# Altium PCB hmi_driver.PcbDoc
Units mm, origin at the board's own origin, x right, y up, seen from the top; angles counter-clockwise.
Board outline 93.95 x 43.73 mm, 2 copper layers (Top Layer, Bottom Layer); 79 components, 56 nets, 269 pads, 33 vias.
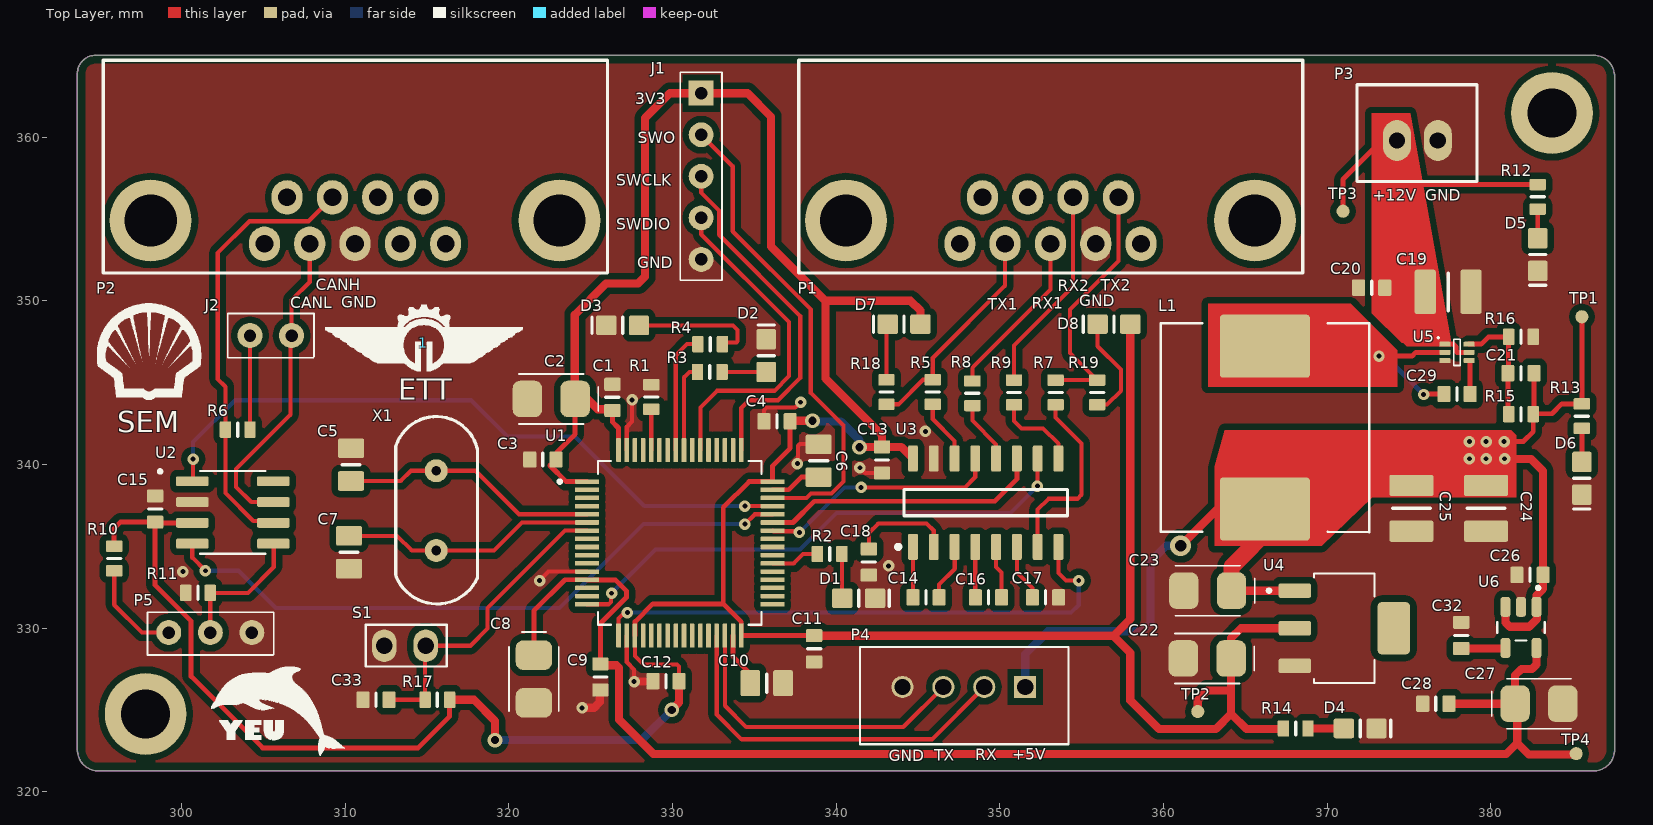
[diagram p0: Top Layer view]
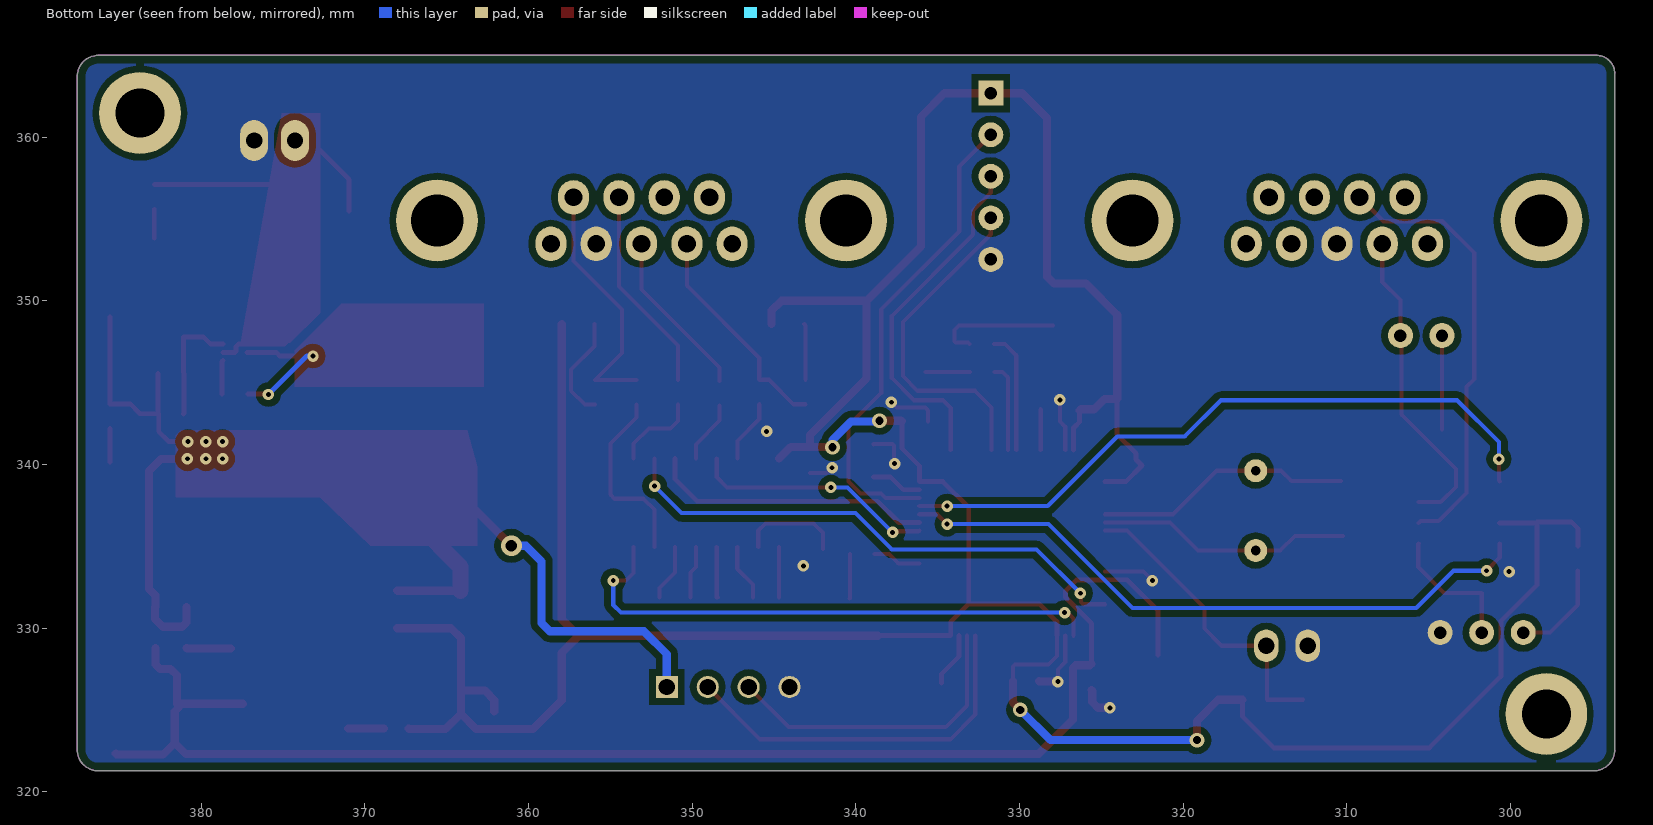
[diagram p1: Bottom Layer view, seen from below]

## Layer stack, top to bottom
Top Solder: solder mask 0.0102, Solder Resist, Dk 3.5
Top Layer: signal copper 0.0356
Dielectric 1: dielectric 0.32, FR-4, Dk 4.8
Bottom Layer: signal copper 0.0356
Bottom Solder: solder mask 0.0102, Solder Resist, Dk 3.5

## Board outline
293.625,322.545 293.625,363.9 cw(c294.725,363.9) 294.725,365 386.305,365 cw(c386.305,363.73) 387.575,363.73 387.575,322.545 cw(c386.305,322.545) 386.305,321.275 294.895,321.275 cw(c294.895,322.545)

## Design rules (kind name [scope] priority, off if disabled: settings)
BoardOutlineClearance Silk_Top [OnLayer('Top Overlay')] p1: gap=0 ignorepadtopadclearanceinfootprint=FALSE
BoardOutlineClearance [All] p2: gap=0.5 ignorepadtopadclearanceinfootprint=FALSE
Clearance VIN [InNet('VIN')] p1: gap=0.5 ignorepadtopadclearanceinfootprint=FALSE except(0: Arc-Hole Track-Hole SMDPad-Hole THPad-Hole Via-Hole Fill-Hole Poly-Hole Region-Hole Text-Hole)
Clearance SOT-563 [HasFootprint('SOT-563')] p2: gap=0.2 ignorepadtopadclearanceinfootprint=FALSE except(0: Arc-Hole Track-Hole SMDPad-Hole THPad-Hole Via-Hole Fill-Hole Poly-Hole Region-Hole Text-Hole)
Clearance 10-WFDFN [HasFootprint('10-WFDFN')] p3: gap=0.2 ignorepadtopadclearanceinfootprint=FALSE except(0: Arc-Hole Track-Hole SMDPad-Hole THPad-Hole Via-Hole Fill-Hole Poly-Hole Region-Hole Text-Hole)
Clearance HTSSOP-14 [HasFootprint('HTSSOP-14')] p4: gap=0.2 ignorepadtopadclearanceinfootprint=FALSE except(0: Arc-Hole Track-Hole SMDPad-Hole THPad-Hole Via-Hole Fill-Hole Poly-Hole Region-Hole Text-Hole)
Clearance Polygon [IsRegion] p5: gap=0.4 ignorepadtopadclearanceinfootprint=FALSE except(0: Arc-Hole Track-Hole SMDPad-Hole THPad-Hole Via-Hole Fill-Hole Poly-Hole Region-Hole Text-Hole)
Clearance USB_CONNECTOR [HasFootprint('MICRO USB B SMD')] p6: gap=0.2 ignorepadtopadclearanceinfootprint=TRUE except(0: Arc-Hole Track-Hole SMDPad-Hole THPad-Hole Via-Hole Fill-Hole Poly-Hole Region-Hole Text-Hole; 0.15: Arc-SMDPad Arc-THPad Track-SMDPad Track-THPad SMDPad-SMDPad SMDPad-THPad THPad-THPad)
Clearance [All] p7: gap=0.2 ignorepadtopadclearanceinfootprint=FALSE except(0: Arc-Hole Track-Hole SMDPad-Hole THPad-Hole Via-Hole Fill-Hole Poly-Hole Region-Hole Text-Hole)
Height [All] p1: minheight=0 maxheight=35 prefheight=12.7
HoleSize [All] p1: absolutevalues=TRUE maxlimit=3.5 minlimit=0.025 maxpercent=80.000 minpercent=20.000
MinimumSolderMaskSliver [All] p1: minsoldermaskwidth=0.1
PolygonConnect [All] p1: connectstyle=Direct reliefconductorwidth=0.254 reliefentries=4 polygonreliefangle="90 Angle" airgapwidth=0.254
RoutingVias [All] p1: holewidth=0.711 width=1.27 viastyle="Through Hole" minholewidth=0.3 minwidth=0.6 maxholewidth=0.711 maxwidth=1.27
SilkToSilkClearance [All] p1: silktosilkclearance=0.1
SilkToSolderMaskClearance [IsPad] p1: minsilkscreentomaskgap=0.1 clearancetoexposedcopper=TRUE
SolderMaskExpansion [All] p1: expansion=0.05
Width [All] p1: maxlimit=2 minlimit=0.25 preferedwidth=0.25
25 further rules are at their usual default settings.

## Classes and differential pairs
component class Power: C19 C20 C21 C22 C23 C24 C25 C26 C27 C28 C29 C32 D4 D5 D6 L1 R12 R13 R14 R15 R16 TP1 TP2 TP3 TP4 U4 U5 U6
component class Peripheral: C13 C14 C15 C16 C17 C18 D7 D8 J2 P5 R5 R6 R7 R8 R9 R10 R11 R18 R19 U2 U3
component class MCU: C1 C2 C3 C4 C5 C6 C7 C8 C9 C10 C11 C12 C33 D1 D2 D3 R1 R2 R3 R4 R17 S1 U1 X1
component class Connectors: J1 P1 P2 P3 P4

## Components (designator, comment, footprint, x,y, rotation, side; value= is the part's Value field where it differs from the comment)
1 "KTUETT_LOGO" KTUETT_LOGO 314.75,347.425 r0 top locked
C1 "100nF" CAP-0603#1 326.325,344.1 r270 top locked
C2 "T491B475K016AT" KEMET_CAP_TAN-B 322.59,344 r180 top locked
C3 "100nF" CAP-0603#1 322.075,340.3 r0 top locked
C4 "100nF" CAP-0603#1 336.387,342.636 r0 top locked
C5 "22pF" CAP-0805 310.352,339.985 r90 top locked
C6 "2.2uF" CAP-0805 338.927,340.223 r270 top locked
C7 "22pF" CAP-0805 310.225,334.635 r90 top locked
C8 "T491B105K025AT" KEMET_CAP_TAN-B 321.528,326.888 r270 top locked
C9 "100nF" CAP-0603#1 325.592,327.015 r90 top locked
C10 "2.2uF" CAP-0805 335.752,326.634 r180 top locked
C11 "100nF" CAP-0603#1 338.65,328.733 r90 top locked
C12 "100nF" CAP-0603#1 329.6,326.75 r0 top
C13 "100nF" CAP-0603#1 342.8,340.275 r90 top locked
C14 "100nF" CAP-0603#1 345.493,331.872 r0 top locked
C15 "100nF" CAP-0603#1 298.375,337.275 r90 top locked
C16 "100nF" CAP-0603#1 349.303,331.872 r0 top locked
C17 "100nF" CAP-0603#1 352.793,331.872 r0 top locked
C18 "100nF" CAP-0603#1 341.998,334.031 r270 top locked
C19 "22uF" CAP-1210 377.4,350.55 r180 top locked
C20 "100nF" CAP-0603#1 372.725,350.8 r0 top locked
C21 "56pF" CAP-0603#1 381.85,345.575 r0 top locked
C22 "T491B226K020AT" KEMET_CAP_TAN-B 362.676,328.14 r180 top locked
C23 "T491B106M016AT" KEMET_CAP_TAN-B 362.701,332.281 r180 top locked
C24 "22uF" CAP-1210 379.723,337.318 r90 top locked
C25 "22uF" CAP-1210 375.151,337.318 r90 top locked
C26 "100nF" CAP-0603#1 382.4,333.25 r0 top locked
C27 "T491B106M016AT" KEMET_CAP_TAN-B 382.95,325.375 r0 top locked
C28 "100nF" CAP-0603#1 376.65,325.375 r0 top locked
C29 "100nF" CAP-0603#1 377.943,344.308 r0 top locked
C32 "470pF" CAP-0603#2 378.175,329.85 r270 top locked
C33 "100nF" CAP-0603#1 311.876,325.618 r0 top locked
D1 "BL-HKB35A-TRB" LED-0805 341.375,331.825 r0 top locked
D2 "BL-HKB35A-TRB" LED-0805 335.725,346.65 r90 top locked
D3 "BL-HKB35A-TRB" LED-0805 326.95,348.5 r180 top locked
D4 "BL-HKB35A-TRB" LED-0805 372.022,323.865 r0 top locked
D5 "BL-HKB35A-TRB" LED-0805 382.873,352.826 r270 top locked
D6 "BL-HKB35A-TRB" LED-0805 385.574,339.153 r270 top locked
D7 "BL-HKB35A-TRB" LED-0805 344.15,348.575 r180 top locked
D8 "BL-HKB35A-TRB" LED-0805 356.975,348.575 r180 top locked
J1 "HEADER 1X5" "Header 2.54 1x5" 333.02,356.34 r270 top locked
J2 "DS1021-1X2SF11-B" "1x2 HEADER" 305.09,347.85 r180 top locked
L1 "4.7uH" IND_EATON_DR125-4R7-R 366.2,342.25 r270 top locked
P1 "DS1037-09FNAKT74" "D SUB 9PIN FEMALE 90C TH" 353.095,354.905 r180 top locked
P2 "DS1037-09FNAKT74" "D SUB 9PIN FEMALE 90C TH" 310.595,354.905 r180 top locked
P3 "L-KLS1-XL4-2.50-02-S" "2 PIN MALE 180C TH 2.50MM" 377.029,354.72 r0 top locked
P4 "L-KLS1-2.50-04-S" "1x4 TUNIC CONNECTOR" 346.725,325.9 r180 top locked
P5 "1x3 Header" "1x3 Header (2.54 mm)" 301.75,329.725 r180 top locked
R1 "10k" RES-0603#1 328.699,344.125 r90 top locked
R2 "1k" RES-0603#1 339.6,334.525 r0 top locked
R3 "1k" RES-0603#1 332.275,345.65 r0 top locked
R4 "1k" RES-0603#1 332.3,347.35 r0 top locked
R5 "1k" RES-0603#1 345.9,344.425 r270 top locked
R6 "120" RES-0603#2 303.45,342.125 r180 top locked
R7 "1k" RES-0603#1 353.41,344.403 r270 top locked
R8 "1k" RES-0603#1 348.325,344.35 r270 top locked
R9 "1k" RES-0603#1 350.87,344.403 r270 top locked
R10 "0" RES-0603#2 295.875,334.225 r90 top locked
R11 "10k" RES-0603#1 301,332.15 r0 top locked
R12 "10k" RES-0603#1 382.873,356.354 r90 top locked
R13 "10k" RES-0603#1 385.574,342.951 r90 top locked
R14 "1k" RES-0603#1 368.085,323.865 r0 top locked
R15 "52.3k" RES-0603#1 381.85,343.075 r0 top locked
R16 "10k" RES-0603#1 381.85,347.8 r180 top locked
R17 "10k" RES-0603#1 315.625,325.618 r180 top locked
R18 "1k" RES-0603#1 343.075,344.425 r270 top locked
R19 "1k" RES-0603#1 355.95,344.403 r90 top locked
S1 "Push Button" "2.54mm_Push Button" 313.654,328.92 r0 top locked
TP1 "Test Point" "0.8mm Test Point" 385.574,349.025 r90 top locked
TP2 "Test Point" "0.8mm Test Point" 362.1,324.9 r90 top locked
TP3 "Test Point" "0.8mm Test Point" 370.975,355.475 r90 top locked
TP4 "Test Point" "0.8mm Test Point" 385.225,322.325 r0 top locked
U1 "STM32F215RG" LQFP64 330.113,334.508 r0 top locked
U2 "SND65HVD230" SOIC-8 303.063,337.192 r0 top locked
U3 "MAX3232IDWR" SOIC-16 346.443,337.587 r90 top locked
U4 "AMS1117-3.3" SOT-223 369.76,329.863 r0 top locked
U5 "TPS562202DRLR" SOT-563 377.943,346.848 r0 top locked
U6 "TLV70233DBVT" SOT23-5 381.753,329.995 r270 top locked
X1 "16Mhz" "OSC-THT (11.5*5.00*3.60)" 315.559,337.175 r90 top locked

## Footprints (in the part's own frame and the unit in brackets; to place one, negate y for a bottom-side part, rotate by r counter-clockwise, add the part's x,y. Pads: shape width x height; smd on the part's side, far side on the other; paste and mask are expansions set on the pad)
"0.8mm Test Point" [mm]
  round 0.8 smd: 1(0,0)
"1x2 HEADER" [mil]
  round 60 hole 30: 1(-63.98,-0.98) 2(36.02,-0.98)
  silkscreen extent -118,-54 90,52, body extent -114,-51 86,49, height 374
"1x3 Header (2.54 mm)" [mil]
  round 60 hole 30: 1(-100,0) 2(0,0) 3(100,0)
  silkscreen extent -153,-49 151,54, body extent -150,-50 150,50, height 362
"1x4 TUNIC CONNECTOR" [mm]
  rect 1.35x1.35 hole 1 mask+0.076: 1(-4.825,-0.5)
  round 1.35 hole 1 mask+0.076: 2(-2.325,-0.5) 3(0.175,-0.5) 4(2.675,-0.5)
  silkscreen extent -7.47,-2.95 5.28,3, body extent -7.27,-2.87 5.13,2.88, height 7
"2 PIN MALE 180C TH 2.50MM" [mm]
  oval 1.7x2.5 hole 1: 1(-2.754,5.08) 2(-0.254,5.08)
  silkscreen extent -5.2,2.57 2.13,8.48, body extent -5.12,2.64 2.06,8.48, height 7.21
"2.54mm_Push Button" [mm]
  oval 1.5x2 hole 1: 1(-1.27,0) 2(1.27,0)
  silkscreen extent -2.41,-1.27 2.54,1.27
CAP-0603#1 [mm]
  rrect20% 0.8x1 smd: 1(-0.8,0) 2(0.8,0)
  silkscreen extent 0,-0.4 0,0.4, body extent -0.8,-0.4 0.8,0.41, height 0.87
CAP-0603#2 [mm]
  rrect20% 0.8x1 smd: 1(-0.5,0.025) 2(1.1,0.025)
  silkscreen extent 0.3,-0.38 0.3,0.42, body extent -0.5,-0.38 1.1,0.43, height 0.87
CAP-0805 [mm]
  rrect20% 1.2x1.6 smd: 1(-1,0) 2(1,0)
  silkscreen extent 0,-0.55 0,0.55, body extent -1,-0.62 1,0.63, height 0.78
CAP-1210 [mm]
  rrect20% 1.3x2.7 smd: 1(-1.4,0) 2(1.4,0)
  silkscreen extent 0,-1.15 0,1.15, body extent -1.6,-1.25 1.6,1.25, height 1.3
"D SUB 9PIN FEMALE 90C TH" [mm]
  round 5 hole 3.2: 0(-12.495,0) 0(12.495,0)
  oval 1.9x2.1 hole 1.09: 1(5.54,1.42) 2(2.77,1.42) 3(0,1.42) 4(-2.77,1.42) 5(-5.54,1.42) 6(4.155,-1.42) 7(1.385,-1.42) 8(-1.385,-1.42) 9(-4.155,-1.42)
  silkscreen extent -15.42,-9.8 15.39,3.2, body extent -15.42,-15.34 15.39,2.96, height 12.47
"Header 2.54 1x5" [mil]
  rect 60x60 hole 30: 1(-250,-50)
  round 60 hole 30: 2(-150,-50) 3(-50,-50) 4(50,-50) 5(150,-50)
  silkscreen extent -300,-100 200,0, body extent -300,-100 200,0, height 245
IND_EATON_DR125-4R7-R [mm]
  rrect10% 3.85x5.5 smd: 1(-4.975,0) 2(4.975,0)
  silkscreen extent -6.38,-6.38 6.4,6.38, body extent -6.25,-6.25 6.25,6.25, height 8.5
KEMET_CAP_TAN-B [mm]
  rrect50% 1.8x2.23 smd paste+0 mask+0.04: 1(-1.46,0) 2(1.46,0)
  silkscreen extent -2.88,-1.53 1.98,1.53, body extent -1.85,-1.5 1.85,1.5, height 2.1
KTUETT_LOGO [mm]
  silkscreen extent -5.99,-1.69 6.1,2.35
LED-0805 [mm]
  rrect20% 1.25x1.2 smd: 1(-1,0) 2(1,0)
  silkscreen extent 0,-0.5 1.88,0.5, body extent -1,-0.45 1.06,0.46, height 0.85
LQFP64 [mm]
  rrect25% 1.47x0.28 smd: 1(-5.334,4.445) 2(-5.334,3.945) 3(-5.334,3.445) 4(-5.334,2.945) 5(-5.334,2.445) 6(-5.334,1.945) 7(-5.334,1.445) 8(-5.334,0.945) 9(-5.334,0.445) 10(-5.334,-0.055) 11(-5.334,-0.555) 12(-5.334,-1.055) 13(-5.334,-1.555) 14(-5.334,-2.055) 15(-5.334,-2.555) 16(-5.334,-3.055) 33(6.006,-3.055) 34(6.006,-2.555) 35(6.006,-2.055) 36(6.006,-1.555) 37(6.006,-1.055) 38(6.006,-0.555) 39(6.006,-0.055) 40(6.006,0.445) 41(6.006,0.945) 42(6.006,1.445) 43(6.006,1.945) 44(6.006,2.445) 45(6.006,2.945) 46(6.006,3.445) 47(6.006,3.945) 48(6.006,4.445)
  rrect25% 0.28x1.47 smd: 17(-3.414,-4.975) 18(-2.914,-4.975) 19(-2.414,-4.975) 20(-1.914,-4.975) 21(-1.414,-4.975) 22(-0.914,-4.975) 23(-0.414,-4.975) 24(0.086,-4.975) 25(0.586,-4.975) 26(1.086,-4.975) 27(1.586,-4.975) 28(2.086,-4.975) 29(2.586,-4.975) 30(3.086,-4.975) 31(3.586,-4.975) 32(4.086,-4.975) 49(4.086,6.365) 50(3.586,6.365) 51(3.086,6.365) 52(2.586,6.365) 53(2.086,6.365) 54(1.586,6.365) 55(1.086,6.365) 56(0.586,6.365) 57(0.086,6.365) 58(-0.414,6.365) 59(-0.914,6.365) 60(-1.414,6.365) 61(-1.914,6.365) 62(-2.414,6.365) 63(-2.914,6.365) 64(-3.414,6.365)
  silkscreen extent -7.1,-4.31 5.34,5.7, body extent -5.68,-5.33 6.33,6.68, height 1.56
"OSC-THT (11.5*5.00*3.60)" [mm]
  round 1.4 hole 0.6: 1(-2.44,0) 2(2.44,0)
  silkscreen extent -5.7,-2.53 5.75,2.47, body extent -5.59,-2.4 5.69,2.37, height 3.63
RES-0603#1 [mm]
  rrect20% 0.7x1 smd: 1(-0.75,0) 2(0.75,0)
  silkscreen extent 0,-0.4 0,0.4, body extent -0.8,-0.41 0.8,0.41, height 0.51
RES-0603#2 [mm]
  rrect20% 0.7x1 smd: 1(-0.725,0) 2(0.775,0)
  silkscreen extent 0.02,-0.4 0.02,0.4, body extent -0.78,-0.41 0.83,0.41, height 0.51
SOIC-8 [mm]
  rrect25% 1.97x0.6 smd: 1(-2.413,1.778) 2(-2.413,0.508) 3(-2.413,-0.762) 4(-2.413,-2.032) 5(2.537,-2.032) 6(2.537,-0.762) 7(2.537,0.508) 8(2.537,1.778)
  silkscreen extent -4.48,-2.65 2.06,2.48, body extent -2.92,-2.6 3.08,2.3, height 1.75
SOIC-16 [mm]
  rrect30% 1.6x0.6 smd: 1(-2.625,1.75) 2(-2.625,0.48) 3(-2.625,-0.79) 4(-2.625,-2.06) 5(-2.625,-3.33) 6(-2.625,-4.6) 7(-2.625,-5.87) 8(-2.625,-7.14) 9(2.775,-7.14) 10(2.775,-5.87) 11(2.775,-4.6) 12(2.775,-3.33) 13(2.775,-2.06) 14(2.775,-0.79) 15(2.775,0.48) 16(2.775,1.75)
  silkscreen extent -2.75,-7.7 0.87,2.77, body extent -2.92,-7.64 3.08,2.26, height 1.4
SOT23-5 [mm]
  rrect50% 1.21x0.59 smd: 1(-1.3,1.05) 2(-1.3,0.1) 3(-1.3,-0.85) 4(1.21,-0.85) 5(1.21,1.05)
  silkscreen extent -2.55,-1.35 0.75,1.55, body extent -1.4,-1.37 1.4,1.53, height 1.45
SOT-223 [mm]
  rrect25% 1.97x0.89 smd: 1(-1.732,2.427) 2(-1.732,0.127) 3(-1.732,-2.173)
  rrect25% 1.97x3.19 smd: 4(4.318,0.127)
  silkscreen extent -3.41,-3.22 3.14,3.48, body extent -2.2,-3.2 4.8,3.3, height 1.8
SOT-563 [mm]
  rrect30% 0.67x0.3 smd: 1(-0.74,0.5) 2(-0.74,0) 3(-0.74,-0.5) 4(0.74,-0.5) 5(0.74,0) 6(0.74,0.5)
  silkscreen extent -1.14,-0.8 0.2,0.9, body extent -0.84,-0.8 0.76,0.8, height 0.6

## Part data
C1 C3 C4 C9 C11 C12 C13 C14 C15 C16 C17 C18 C20 C26 C28 C29 C33: library part CGA3E2X7R1H104K080AA, Manufacturer=TDK, Temperature Coefficient=X7R, Tolerance=%10, Voltage=50V, Component Type="Ceramic Capacitor", Man Code=CGA3E2X7R1H104K080AA
C2: "CAP TANT 4.7UF 10% 16V 1411", Capacitance="4.7 µF", ESR (Equivalent Series Resistance)="3.5 Ohm", Lifetime @ Temp.="2000 Hrs @ 125°C", Manufacturer=KEMET, Manufacturer Size Code=B, Operating Temperature="-55°C ~ 125°C", Package="Tape & Reel (TR)", Package / Case="1411 (3528 Metric)", Ratings=-, Tolerance=±10%, Voltage - Rated="16 V", Digikey Link=https://www.digikey.com/en/products/detail/kemet/T491B475K016AT/818582, Failure Rate=-, Farnell TR Link=https://tr.farnell.com/kemet/t491b475k016at/cap-4-7-f-16v-10-smd/dp/1457453?st=t491b475k016at, Features="General Purpose", Height - Seated (Max)="0.083\" (2.10mm)", Lead Spacing=-, Mounting Type="Surface Mount", Mouser Link=https://www.mouser.com.tr/ProductDetail/KEMET/T491B475K016AT?qs=pWsseJt92L15yATvg%252BRzxw%3D%3D, Ozdisan Link=https://ozdisan.com/pasif-komponentler/kondansatorler/tantal-kondansatorler/T491B475K016AT, Series=T491, Size / Dimension="0.138\" L x 0.110\" W (3.50mm x 2.80mm)", Type=Molded
C5 C7: library part CL21C220JBANNNC, Manufacturer="Samsung Electro-Mechanics", Temperature Coefficient=C0G, Tolerance=%5, Voltage=50V, Component Type="Ceramic Capacitor", Man Code=CL21C220JBANNNC
C6 C10: library part CL21B225KAFVPNE_1, Manufacturer="Samsung Electro-Mechanics", Temperature Coefficient=X7R, Tolerance=%10, Voltage=25V, Component Type="Ceramic Capacitor", Man Code=CL21B225KAFVPNE
C8: "CAP TANT 1UF 10% 25V 1411", Capacitance="1 µF", ESR (Equivalent Series Resistance)="5 Ohm", Lifetime @ Temp.="2000 Hrs @ 125°C", Manufacturer=KEMET, Manufacturer Size Code=B, Operating Temperature="-55°C ~ 125°C", Package="Tape & Reel (TR)", Package / Case="1411 (3528 Metric)", Ratings=-, Tolerance=±10%, Voltage - Rated="25 V", Digikey Link=https://www.digikey.com/en/products/detail/kemet/T491B105K025AT/3724810, Failure Rate=-, Farnell TR Link=https://tr.farnell.com/kemet/t491b105k025at/cap-1-f-25v-10/dp/2321211?st=t491b105k025at, Features="General Purpose", Height - Seated (Max)="0.083\" (2.10mm)", Lead Spacing=-, Mounting Type="Surface Mount", Mouser Link=https://www.mouser.com.tr/ProductDetail/KEMET/T491B105K025AT?qs=MSnLt6VizIVP1rbCgJ%252B8hw%3D%3D, Ozdisan Link=https://ozdisan.com/pasif-komponentler/kondansatorler/tantal-kondansatorler/T491B105K025AT, Series=T491, Size / Dimension="0.138\" L x 0.110\" W (3.50mm x 2.80mm)", Type=Molded
C19 C24 C25: library part CL32B226KAJNNNE, Manufacturer="Samsung Electro-Mechanics", Temperature Coefficient=X7R, Tolerance=%10, Voltage=25V, Component Type="Ceramic Capacitor", Man Code=CL32B226KAJNNNE
C21: library part GCM1885C2A560FA16D, Manufacturer=Murata, Temperature Coefficient=C0G, Tolerance=%1, Voltage=100V, Component Type="Ceramic Capacitor", Man Code=GCM1885C2A560FA16D
C22: "CAP TANT 22UF 10% 20V 1411", Capacitance="22 µF", ESR (Equivalent Series Resistance)="4 Ohm", Lifetime @ Temp.="2000 Hrs @ 125°C", Manufacturer=KEMET, Manufacturer Size Code=B, Operating Temperature="-55°C ~ 125°C", Package="Tape & Reel (TR)", Package / Case="1411 (3528 Metric)", Ratings=-, Tolerance=±10%, Voltage - Rated="20 V", Digikey Link=https://www.digikey.com/en/products/detail/kemet/T491B226K020AT/1842086, Failure Rate=-, Farnell TR Link=https://tr.farnell.com/kemet/t491b226k020at/cap-22-f-20v-10/dp/2321214?st=t491b226k020at, Features="General Purpose", Height - Seated (Max)="0.083\" (2.10mm)", Lead Spacing=-, Mounting Type="Surface Mount", Mouser Link=https://www.mouser.com.tr/ProductDetail/KEMET/T491B226K020AT?qs=2QcrrtqkWlnFmgDgM5wdlA%3D%3D, Ozdisan Link=https://ozdisan.com/pasif-komponentler/kondansatorler/tantal-kondansatorler/T491B226K020AT, Series=T491, Size / Dimension="0.138\" L x 0.110\" W (3.50mm x 2.80mm)", Type=Molded
C23 C27: "CAP TANT 10UF 20% 16V 1411", Capacitance="10 µF", ESR (Equivalent Series Resistance)="2.5 Ohm", Lifetime @ Temp.="2000 Hrs @ 125°C", Manufacturer=KEMET, Manufacturer Size Code=B, Operating Temperature="-55°C ~ 125°C", Package="Tape & Reel (TR)", Package / Case="1411 (3528 Metric)", Ratings=-, Tolerance=±20%, Voltage - Rated="16 V", Digikey Link=https://www.digikey.com/en/products/detail/kemet/T495B475M025ZTE750/8764094, Failure Rate=-, Farnell TR Link=https://tr.farnell.com/kemet/t491b106m016at/cap-10-f-16v-20/dp/2462772?st=t491b106m016at, Features="General Purpose", Height - Seated (Max)="0.083\" (2.10mm)", Lead Spacing=-, Mounting Type="Surface Mount", Mouser Link=https://www.mouser.com.tr/ProductDetail/KEMET/T491B106M016AT?qs=WydH9nGI6cAnkEyQJLjSzA%3D%3D, Ozdisan Link=https://ozdisan.com/pasif-komponentler/kondansatorler/tantal-kondansatorler/T491B106M016AT, Series=T491, Size / Dimension="0.138\" L x 0.110\" W (3.50mm x 2.80mm)", Type=Molded
C32: library part CL10B471KB8NNNC, Manufacturer=Samsung, Tolerance=%10, Voltage=50V, Component Type=Capacitor, Man Code=CL10B471KB8NNNC
D1 D2 D3 D4 D5 D6 D7 D8: Colour=Yellow, Manufacturer="BRIGHT LED", Component Type=Led, If=20mA, Lens Transparency="Water Clear", Luminous Intensity=94mcd, Man Code=BL-HKB35A-TRB, Vf=2.2V
J1: "2.54mm 1x5 Header"
J2: Manufacturer="KLS Electronic", Component Type=Header, Man Code=DS1021-1X2SF11-B, Number of Pins=2, Number of Row=1, Pitch=2.54mm
L1: library part DR125-4R7-R, Manufacturer=Eaton, Max DC Current=7.18A, Max Dc Resistance=10.5mOhm, Tolerance=%20, Component Type="Fixed Inductor", Man Code=DR125-4R7-R
P1 P2: Contact Resistance(max)=20mohm, Current(max)=1.5A, Manufacturer=CONNFLY, Component Type="D SUB 9 PIN Female Connector", Contact Number=9, Gender=Female, Man Code=DS1037-09FNAKT74, Mating Connector=L-KLS1-213-09-M-L, Mounting Angle=90, Mounting Style="Through Hole", Number of Row=2, Pitch=2.77mm
P3: Contact Resistance (Max)=10mohm, Current(max)=3A, Manufacturer="KLS ELECTRONIC", Component Type="CONN 2PIN MALE 180C TH 2.5mm", Contact Number=3, Gender=Male, Man Code=L-KLS1-XL4-2.50-02-S, Mounting Angle=180, Mounting Style=THT, Number of Row=1, Pitch=2.50mm
P4: Manufacturer="KLS ELECTRONIC", Comopnent Type=Connector, Gender=Male, Man Code=L-KLS1-2.50-04-S, Mounting Type=THT, Number of Pins=4, Number of rows=1, Pitch=2.50mm
R1 R11 R12 R13 R16 R17: library part CRCW060310K0FKEA, Manufacturer=Vishay, Power=0.1W, Tolerance=%1, Component Type="Chip Resistor", Man Code=CRCW060310K0FKEA
R2 R3 R4 R5 R7 R8 R9 R14 R18 R19: library part CRCW06031K00FKEAC, Manufacturer=Vishay, Power=0.1W, Tolerance=%1, Component Type="Chip Resistor", Man Code=CRCW06031K00FKEAC
R6: library part RC0603FR-07120RL, Compnenet Type="Chip Resistor", Manufacturer=YAGEO, Tolerance=%1, Voltage=75V, Man Code=RC0603FR-07120RL
R10: library part 0603SAJ0000T5E, Manufacturer=ROYALOHM, Tolerance=%5, Voltage=75V, Component Type="Chip Resistor", Man Code=0603SAJ0000T5E
R15: library part ERJ-3EKF5232V, Manufacturer=Panasonic, Power=0.1W, Tolerance=%1, Component Type="Chip Resistor", Man Code=ERJ-3EKF5232V
U1: Manufacturer=STM, Supply Voltage=1.8V-3.6V, Component Type=Microcontroller, Man Code=STM32F215RG, Number Of Bits=32, Number of I/O=51, Program Memory Size="1 MB", Speed="120 mHz"
U2: Manufacturer=TI, Component Type="CAN-BUS Transreceiver", Man Code=SN65HVD230
U3: Manufacturer=Texas, Supply Voltage="3V to 5V", Component Type="IC Driver", Data Rate=250kbps, Man Code=MAX3232IDWR
U4: Manufacturer=Monolithic, Output Current=1A, Output Voltage=3.3V, Componenet Type=Regulator, Man Code=AMS1117-3.3
U5: Manufacturer="Texas Instruments", Component Type=Switcher, Man Code=TPS562202DRLR
U6: Current=300mA, Manufacturer=TEXAS, Voltage=3.3V, Component Type=LDO, Man Code=TLV70233DBVT
X1: library part AS49S-16M-FC160F3, Capacitance=16pF, Frequency Stability=50ppm, Frequency Tolerance=20ppm, Manufacturer=ANSEN, Component Type="Crystal Oscillator", ESR=30ohm, Man Code=AS49S-16M-FC160F3
1: Component Type=LOGO
P5: Component Type=Connector, Contact Number=3, Gender=Male, Man Code="1x3 Header", Mounting Angle=180, Mounting Style=THT, Number of Row=1, Pitch="2.54 mm"
S1: Component Type="Push Button"
TP1 TP2 TP3 TP4: Component Type="Test Point"

## Free pads (board coordinates)
  round 5 hole 3: ""(297.8,324.75) ""(383.75,361.475)

## Via types
v1: diameter 0.7, hole 0.3, Top Layer to Bottom Layer, tented both sides, 28 vias
v2: diameter 0.9, hole 0.5, Top Layer to Bottom Layer, tented both sides, 4 vias
v3: diameter 1.27, hole 0.711, Top Layer to Bottom Layer, tented both sides, 1 vias

## Nets (pads, with @x,y where several pads share a name; then routed paths per layer and width w, separated by ;. In a path a pad name is that pad's centre, name@x,y a point inside that pad or via, vN(x,y) a via of type N, cw(c..) or ccw(c..) an arc to the next point about the centre after c; other vN are vias at no path point)
+3V3: C1.2 C2.1 C3.2 C4.2 C11.2 C12.2 C13.2 C15.1 C22.1 D7.1 D8.1 J1.1 R10.2 R14.1 R17.1 TP2.1 U1.1 U1.19 U1.32 U1.48 U1.64 U2.3 U3.16 U4.2 | length 231
  Top Layer w0.254: U1.19@327.709,329.543 327.709,328.291 328.225,327.775 330.275,327.775 330.4,327.65 C12.2
  Top Layer w0.3: R10.2 295.875,336.05 295.85,336.075 296.25,336.475 C15.1 ; U2.3 298.42,336.43 C15.1 ; R17.1 316.375,324.6 314.45,322.675 304.95,322.675 300.575,327.05 300.575,330.425 298.375,332.625 C15.1 ; C2.1 324.05,341.85 322.875,340.675 C3.2 322.513,339.938 323.5,338.95 324.776,338.95 U1.1 ; C1.2 326.325,342.6 326.699,342.226 U1.64 ; U1.19@327.709,329.543 327.709,330.392 328.797,331.481 333.1,331.481 ; C4.2 337.187,340.987 336.119,339.919 U1.48 334.678,338.953 333.1,337.375 333.1,331.481 ; C11.2 334.2,329.533 334.2,330.381 333.1,331.481
  Top Layer w0.5: R17.1 317.857,325.618 319.15,324.325 v2(319.15,323.15) ; C1.2 326.25,343.375 325.425,343.375 324.8,344 C2.1 324.025,344.025 324.025,349.15 325.925,351.05 327.9,351.05 328.325,351.475 328.325,361.175 329.84,362.69 J1.1 334.585,362.69 336.025,361.25 336.025,353.325 339.35,350 ; v2(329.95,325) 330.4,325.45 C12.2 ; C4.2 337.226,342.675 v2(338.55,342.675) ; C11.2 356.8,329.533 ; v2(341.425,341.05) 341.45,341.075 C13.2 ; U3.16 343.98,341.075 C13.2 ; D7.1 345.15,349.4 344.55,350 339.35,350 ; D8.1 357.975,346.041 357.977,346.039 357.977,344.261 357.975,344.259 357.975,330.55 356.938,329.512 357.975,328.475 357.975,325.575 359.725,323.825 363.2,323.825 364.136,324.761 ; TP2.1 362.1,325.6 362.675,326.175 364.136,326.175 ; R14.1 367.295,323.825 365.072,323.825 364.136,324.761 ; U4.2 364.74,329.99 364.136,329.386 C22.1 364.136,326.175 ; 339.35,350 339.35,345.25 342.8,341.8 C13.2 ; 364.136,324.761 364.136,326.175
  Bottom Layer w0.5: v2(319.15,323.15) 328.1,323.15 v2(329.95,325) ; v2(338.55,342.675) 338.6,342.625 340.3,342.625 341.425,341.5 v2(341.425,341.05)
+3V3_REF: C8.1 C9.2 C27.1 C28.2 TP4.1 U1.13 U6.5 | length 89.9
  Top Layer w0.3: C8.1 321.528,331.053 323.428,332.953 U1.13 324.789,332.943 326.507,332.943 327.175,332.275 327.175,331.865 325.592,330.282 C9.2
  Top Layer w0.5: C9.2 325.682,327.725 326.575,327.725 326.725,327.575 326.725,324.4 328.825,322.3 380.95,322.3 381.625,322.975 ; C28.2 C27.1 ; U6.5 382.803,327.778 382.525,327.5 381.875,327.5 381.49,327.115 C27.1 ; TP4.1 385.175,322.275 382.325,322.275 381.625,322.975 ; C27.1 381.325,325.21 381.625,324.91 381.625,322.975
+5V: C21.2 C23.1 C24.2 C25.2 C26.2 L1.2 P4.1 R13.2 R15.2 TP1.1 U4.1 U6.1 U6.3 | length 64.9
  Top Layer w0.3: v1(380.825,341.4) 382,341.4 382.6,342 R15.2 R15.2@382.625,343.1 ; C21.2 382.65,343.125 R15.2@382.625,343.1 ; TP1.1 R13.2 384.351,343.701 383.75,343.1 R15.2@382.625,343.1
  Top Layer w0.5: v3(361.05,335.025) 363.3,337.275 L1.2 ; C23.1 368.019,332.281 U4.1 ; v1(380.85,340.35) 380.875,340.325 382.475,340.325 383.2,339.6 C26.2 383.2,332.4 382.803,332.003 U6.1 382.831,331.267 382.831,330.556 382.35,330.075 381.175,330.075 380.903,330.347 U6.3
  Top Layer w1: C23.1 364.161,333.736 366.775,336.35 366.775,336.7 L1.2 369.15,337.275
  Bottom Layer w0.5: P4.1 351.55,328.4 352.95,329.8 358.7,329.8 359.2,330.3 359.2,334.075 360.15,335.025 v3(361.05,335.025)
  other v1: 378.7,340.35 379.725,340.35 378.7,341.4 379.725,341.4
+12V: C19.2 C20.2 P3.1 R12.2 TP3.1 U5.1 U5.5 | length 23
  Top Layer w0.3: TP3.1 370.975,357.425 373.35,359.8 P3.1 ; C20.2 373.525,348.75 374.927,347.348 U5.1 377.727,347.348 377.888,347.187 377.888,346.912 377.952,346.848 U5.5 ; 374.275,357.125 374.296,357.104 R12.2
CAN_RX: U1.44 U2.4 | length 40
  Top Layer w0.254: U2.4 300.65,334.3 v1(301.45,333.5) ; v1(334.425,336.35) 335.028,336.953 U1.44
  Bottom Layer w0.254: v1(301.45,333.5) 303.475,333.5 305.75,331.225 323.1,331.225 328.225,336.35 v1(334.425,336.35)
CAN_TX: U1.45 U2.1 | length 41.6
  Top Layer w0.254: U2.1 300.7,339.02 v1(300.7,340.325) ; v1(334.425,337.453) U1.45
  Bottom Layer w0.254: v1(300.7,340.325) 300.7,341.375 303.25,343.925 317.675,343.925 319.9,341.7 324.025,341.7 328.272,337.453 v1(334.425,337.453)
CANH: P2.7 R6.2 U2.6 | length 27
  Top Layer w0.254: U2.6 305.478,336.552 304.373,336.552 302.675,338.25 R6.2 302.675,344.75 302.2,345.225 302.2,352.925 304.137,354.862 307.747,354.862 P2.7
CANL: J2.1 P2.2 U2.7 | length 19.6
  Top Layer w0.254: U2.7 304.25,337.7 303.325,338.625 303.325,339.725 306.64,343.04 306.64,347.8 J2.1 306.715,350.04 307.825,351.15 P2.2 ; P2.2@307.675,353.79 P2.2@307.795,353.91
GND: C1.1 C2.2 C3.1 C4.1 C5.2 C6.1 C7.1 C8.2 C9.1 C10.1 C11.1 C12.1 C13.1 C15.2 C17.2 C18.2 C19.1 C20.1 C22.2 C23.2 C24.1 C25.1 C26.1 C27.2 C28.1 C32.1 C33.1 D1.2 D2.2 D3.2 D4.2 D5.2 D6.2 J1.5 P1.4 P2.3 P3.2 P4.4 P5.1 R1.2 R11.1 R16.1 S1.1 U1.12 U1.18 U1.63 U2.2 U3.15 U4.3 U5.3 U6.2 | length 19.5
  Top Layer w0.254: v1(321.875,332.9) 322.428,333.453 U1.12 ; U1.18 327.199,327.917 327.65,327.466 v1(327.65,326.725) ; U1.63 327.199,342.299 327.525,342.625 v1(327.525,343.95) ; C4.1 335.587,343.312 335.746,343.471 337.496,343.471 v1(337.825,343.8) ; v1(337.625,340.05) 337.664,340.089 337.664,341.139 337.775,341.25 338.9,341.25 C6.1 ; v1(341.45,339.8) 341.775,339.475 C13.1
  Top Layer w0.5: v1(324.475,325.125) 325.2,325.125 325.55,325.475 325.55,326.173 C9.1 ; v1(327.65,326.725) 328.775,326.725 C12.1
  other v1: 300.075,333.45 343.2,333.8 345.45,342.025
LED1: R2.1 U1.38 | length 3
  Top Layer w0.254: U1.38 337.403,333.953 337.975,334.525 R2.1
LED2: R3.1 U1.56 | length 5.4
  Top Layer w0.254: U1.56 330.699,345.324 331.025,345.65 R3.1
LED3: R4.1 U1.57 | length 7.4
  Top Layer w0.254: U1.57 330.199,346.674 330.875,347.35 R4.1
NetC5_1: C5.1 U1.5 X1.2 | length 15.8
  Top Layer w0.254: C5.1 313.385,338.985 314.015,339.615 X1.2 317.96,339.615 320.622,336.953 U1.5
NetC6_2: C6.2 U1.47 | length 3.1
  Top Layer w0.3: U1.47 337.103,338.453 337.873,339.223 C6.2
NetC7_2: C7.2 U1.6 X1.1 | length 15.6
  Top Layer w0.254: C7.2 313.165,335.635 314.065,334.735 X1.1 319.085,334.735 320.803,336.453 U1.6
NetC10_2: C10.2 U1.31 | length 3.3
  Top Layer w0.3: U1.31 333.7,329.532 333.7,328.25 334.752,327.198 C10.2
NetC14_1: C14.1 U3.1 | length 3.1
  Top Layer w0.254: C14.1 U3.1
NetC14_2: C14.2 U3.3 | length 3.5
  Top Layer w0.254: C14.2 346.293,332.668 347.25,333.625 347.25,334.945 U3.3
NetC16_1: C16.1 U3.4 | length 3.2
  Top Layer w0.254: C16.1@348.437,331.872 C16.1@348.503,331.938 ; C16.1 C16.1@348.503,331.938 ; U3.4 C16.1@348.503,331.938
NetC16_2: C16.2 U3.5 | length 3.2
  Top Layer w0.254: U3.5 349.773,333.727 350.103,333.397 C16.2
NetC17_1: C17.1 U3.6 | length 3.5
  Top Layer w0.254: U3.6 351.043,333.407 351.993,332.457 C17.1
NetC18_1: C18.1 U3.2 | length 6.4
  Top Layer w0.254: C18.1 341.998,335.823 342.575,336.4 345.525,336.4 345.963,335.962 U3.2
NetC21_1: C21.1 R15.1 R16.2 U5.6 | length 7.4
  Top Layer w0.3: U5.6 379.423,347.348 379.875,347.8 R16.2 381.1,345.625 C21.1 381.05,343.125 R15.1
NetC29_1: C29.1 L1.1 U5.2 | length 9.1
  Top Layer w0.3: v1(373.175,346.625) 375.2,346.625 375.423,346.848 U5.2 ; v1(375.9,344.275) 375.933,344.308 C29.1
  Bottom Layer w0.3: v1(373.175,346.625) 373.55,346.625 v1(375.9,344.275)
NetC29_2: C29.2 U5.4 | length 2.1
  Top Layer w0.3: U5.4 378.743,346.288 C29.2
NetC32_2: C32.2 U6.4 | length 2.7
  Top Layer w0.5: C32.2 380.868,328.75 U6.4
NetD1_1: D1.1 R2.2 | length 2.7
  Top Layer w0.254: R2.2 340.35,331.85 D1.1
NetD2_1: D2.1 R3.2 | length 2.7
  Top Layer w0.254: R3.2 D2.1
NetD3_1: D3.1 R4.2 | length 7.8
  Top Layer w0.254: D3.1 333.7,348.5 333.975,348.225 333.975,347.525 333.9,347.45 333.15,347.45 R4.2
NetD4_1: D4.1 R14.2 | length 2.2
  Top Layer w0.5: R14.2 D4.1
NetD5_1: D5.1 R12.1 | length 1.8
  Top Layer w0.254: D5.1 R12.1
NetD6_1: D6.1 R13.1 | length 2
  Top Layer w0.3: D6.1 R13.1
NetD7_2: D7.2 R18.1 | length 3.4
  Top Layer w0.254: R18.1 343.075,348.5 D7.2
NetD8_2: D8.2 R19.1 | length 6.5
  Top Layer w0.254: R19.1 356.553,343.653 357.4,344.5 357.4,345.8 355.975,347.225 D8.2
NetJ2_2: J2.2 R6.1 | length 5.8
  Top Layer w0.254: R6.1 J2.2
NetP5_2: P5.2 R11.2 U2.5 | length 8.4
  Top Layer w0.254: P5.2 R11.2 304.05,332.15 305.625,333.725 305.625,335.135 U2.5
NetP5_3: P5.3 R10.1 | length 6.1
  Top Layer w0.254: R10.1 295.875,331.425 297.575,329.725 P5.3
NetR1_1: R1.1 U1.60 | length 2.5
  Top Layer w0.254: U1.60 R1.1
NetR5_2: R5.2 U3.14 | length 3.9
  Top Layer w0.254: R5.2 345.9,342.775 347.233,341.442 U3.14
NetR7_2: R7.2 U3.7 | length 11.5
  Top Layer w0.254: U3.7 352.313,337.238 352.975,337.9 354.75,337.9 355,338.15 355,341.275 353.41,342.865 R7.2
NetR8_2: R8.2 U3.12 | length 3.8
  Top Layer w0.254: R8.2 348.325,342.675 349.773,341.227 U3.12
NetR9_2: R9.2 U3.9 | length 5.2
  Top Layer w0.254: R9.2 350.87,342.655 351.325,342.2 352.65,342.2 353.583,341.267 U3.9
NEXTION_RX: P4.2 U1.29 | length 23.1
  Top Layer w0.254: U1.29 332.699,324.726 334.225,323.2 345.85,323.2 P4.2
NEXTION_TX: P4.3 U1.30 | length 19.2
  Top Layer w0.254: U1.30 333.199,325.251 334.5,323.95 344.1,323.95 P4.3
NRST: C33.2 R17.2 S1.2 U1.7 | length 19
  Top Layer w0.254: C33.2 R17.2 314.875,328.871 S1.2 317.645,328.92 318.7,329.975 318.7,331.225 323.428,335.953 U1.7
RS232_RX1: P1.3 R8.1 | length 10.4
  Top Layer w0.254: R8.1 348.325,345.925 353.095,350.695 P1.3
RS232_RX2: P1.8 R9.1 | length 12.7
  Top Layer w0.254: R9.1 350.87,347.27 354.48,350.88 P1.8
RS232_TX1: P1.2 R5.1 R18.2 | length 13.6
  Top Layer w0.254: R18.2 343.8,343.675 345.3,345.175 R5.1 345.9,346.5 350.325,350.925 P1.2
RS232_TX2: P1.9 R7.1 R19.2 | length 15.6
  Top Layer w0.254: R7.1 R19.2 354.3,346.803 354.3,349.475 357.25,352.425 P1.9
RX1_IN: U1.42 U3.13 | length 15
  Top Layer w0.254: U1.42 336.152,335.92 337.68,335.92 v1(337.75,335.85) ; v1(341.525,338.6) 347.875,338.6 348.5,339.225 348.5,340.359 U3.13
  Bottom Layer w0.254: v1(337.75,335.85) 340.5,338.6 v1(341.525,338.6)
RX2_IN: U1.17 U3.8 | length 34
  Top Layer w0.254: U1.17 326.7,329.534 326.7,330.575 327.066,330.941 v1(327.241,330.941) ; U3.8 353.583,333.367 354.05,332.9 v1(354.825,332.9)
  Bottom Layer w0.254: v1(327.241,330.941) 354.359,330.941 354.825,331.407 v1(354.825,332.9)
SWCLK: J1.3 U1.49 | length 21.8
  Top Layer w0.254: J1.3 331.75,356.61 332.839,355.521 332.839,354.036 337.8,349.075 337.8,345.275 336.45,343.925 334.675,343.925 334.199,343.449 U1.49
SWDIO: J1.2 U1.46 | length 29.5
  Top Layer w0.254: J1.2 333.675,358.225 333.675,354.25 338.45,349.475 338.45,344.375 340.45,342.375 340.45,338.954 339.723,338.227 338.462,338.227 338.188,337.953 U1.46
SWO: J1.4 U1.54 | length 20.7
  Top Layer w0.254: U1.54 331.699,343.474 332.725,344.5 336.225,344.5 337.125,345.4 337.125,348.695 331.75,354.07 J1.4
TX1_IN: U1.43 U3.11 | length 17.3
  Top Layer w0.3: U1.43 337.363,336.453 338.66,337.75 349.7,337.75 351.043,339.093 U3.11
TX2_IN: U1.16 U3.10 | length 32.5
  Top Layer w0.254: U1.16 326.088,331.453 326.23,331.595 326.23,332.08 v1(326.275,332.125) ; v1(352.3,338.675) 352.3,340.349 U3.10
  Bottom Layer w0.254: v1(326.275,332.125) 328.95,334.8 337.8,334.8 340.025,337.025 350.65,337.025 v1(352.3,338.675)
pads on no net: P1.0 P1.1 P1.5 P1.6 P1.7 P2.0 P2.1 P2.4 P2.5 P2.6 P2.8 P2.9 U1.2 U1.3 U1.4 U1.8 U1.9 U1.10 U1.11 U1.14 U1.15 U1.20 U1.21 U1.22 U1.23 U1.24 U1.25 U1.26 U1.27 U1.28 U1.33 U1.34 U1.35 U1.36 U1.37 U1.39 U1.40 U1.41 U1.50 U1.51 U1.52 U1.53 U1.55 U1.58 U1.59 U1.61 U1.62 U2.8 U4.4

## Polygon pours and split planes (outlines as drawn)
GND on Top Layer "GND_L01_P002" (solid, pour order 2): 286.875,373.7 288.3,375.125 397.925,375.125 397.925,311.125 398.225,310.825 288,310.825
GND on Bottom Layer "GND_L02_P000" (solid, remove dead copper, pour order 0): 286.875,373.7 288.3,375.125 397.925,375.125 397.925,311.125 398.225,310.825 288,310.825

## Keep-outs
Keep-Out Layer:
  the board outline again, w0.07

## Other copper
Top Layer:
  region net +5V: 363.125,339.875 363.125,339.5 363.125,335.025 369.675,335.025 372.75,338 381.575,338 381.575,341.775 381.25,342.1 363.75,342.1
  region net +12V: 377.55,347.612 377.55,347.425 374.55,347.425 372.725,349.25 372.725,361.45 375.075,361.45
  region net NetC29_1: 362.725,349.825 371.45,349.825 374.3,346.975 374.3,344.75 362.725,344.75

## Silkscreen, mask and mechanical layers (free items; w line width, h text height)
Top Overlay:
  drawing of 5 lines, arcs and shapes, not listed
  text "3V3" at 327.725,362.025 h0.7
  text "SWO" at 327.875,359.625 h0.7
  text "SWCLK" at 326.55,357.025 h0.7
  text "GND" at 376,356.125 h0.7
  text "+12V" at 372.8,356.1 h0.7
  text "SWDIO" at 326.55,354.35 h0.7
  text "GND" at 327.85,352 h0.7
  text "CANH" at 308.2,350.65 h0.7
  text "TX2" at 356.175,350.625 h0.7
  text "RX2" at 353.55,350.575 h0.7
  text "GND" at 354.85,349.675 h0.7
  text "GND" at 309.75,349.575 h0.7
  text "CANL" at 306.625,349.55 h0.7
  text "RX1" at 351.95,349.5 h0.7
  text "TX1" at 349.275,349.45 h0.7
  text "ETT" at 313.25,343.95 h1.3
  text "SEM" at 296.075,341.975 h1.3
  text "+5V" at 350.75,321.95 h0.7
  text "RX" at 348.5,321.925 h0.7
  text "TX" at 346,321.9 h0.7
  text "GND" at 343.225,321.875 h0.7

## Dimensions
387.575,322.545 to 293.625,322.545 on Mechanical 1
386.305,365 to 386.305,321.275 on Mechanical 1